# Altium PCB BQ76930.PcbDoc
Units mm, origin at the board's own origin, x right, y up, seen from the top; angles counter-clockwise.
Board outline 83 x 63 mm, 2 copper layers (Top Layer, Bottom Layer); 121 components, 76 nets, 390 pads, 190 vias.
Unrouted connection lines stored in the file: 1.
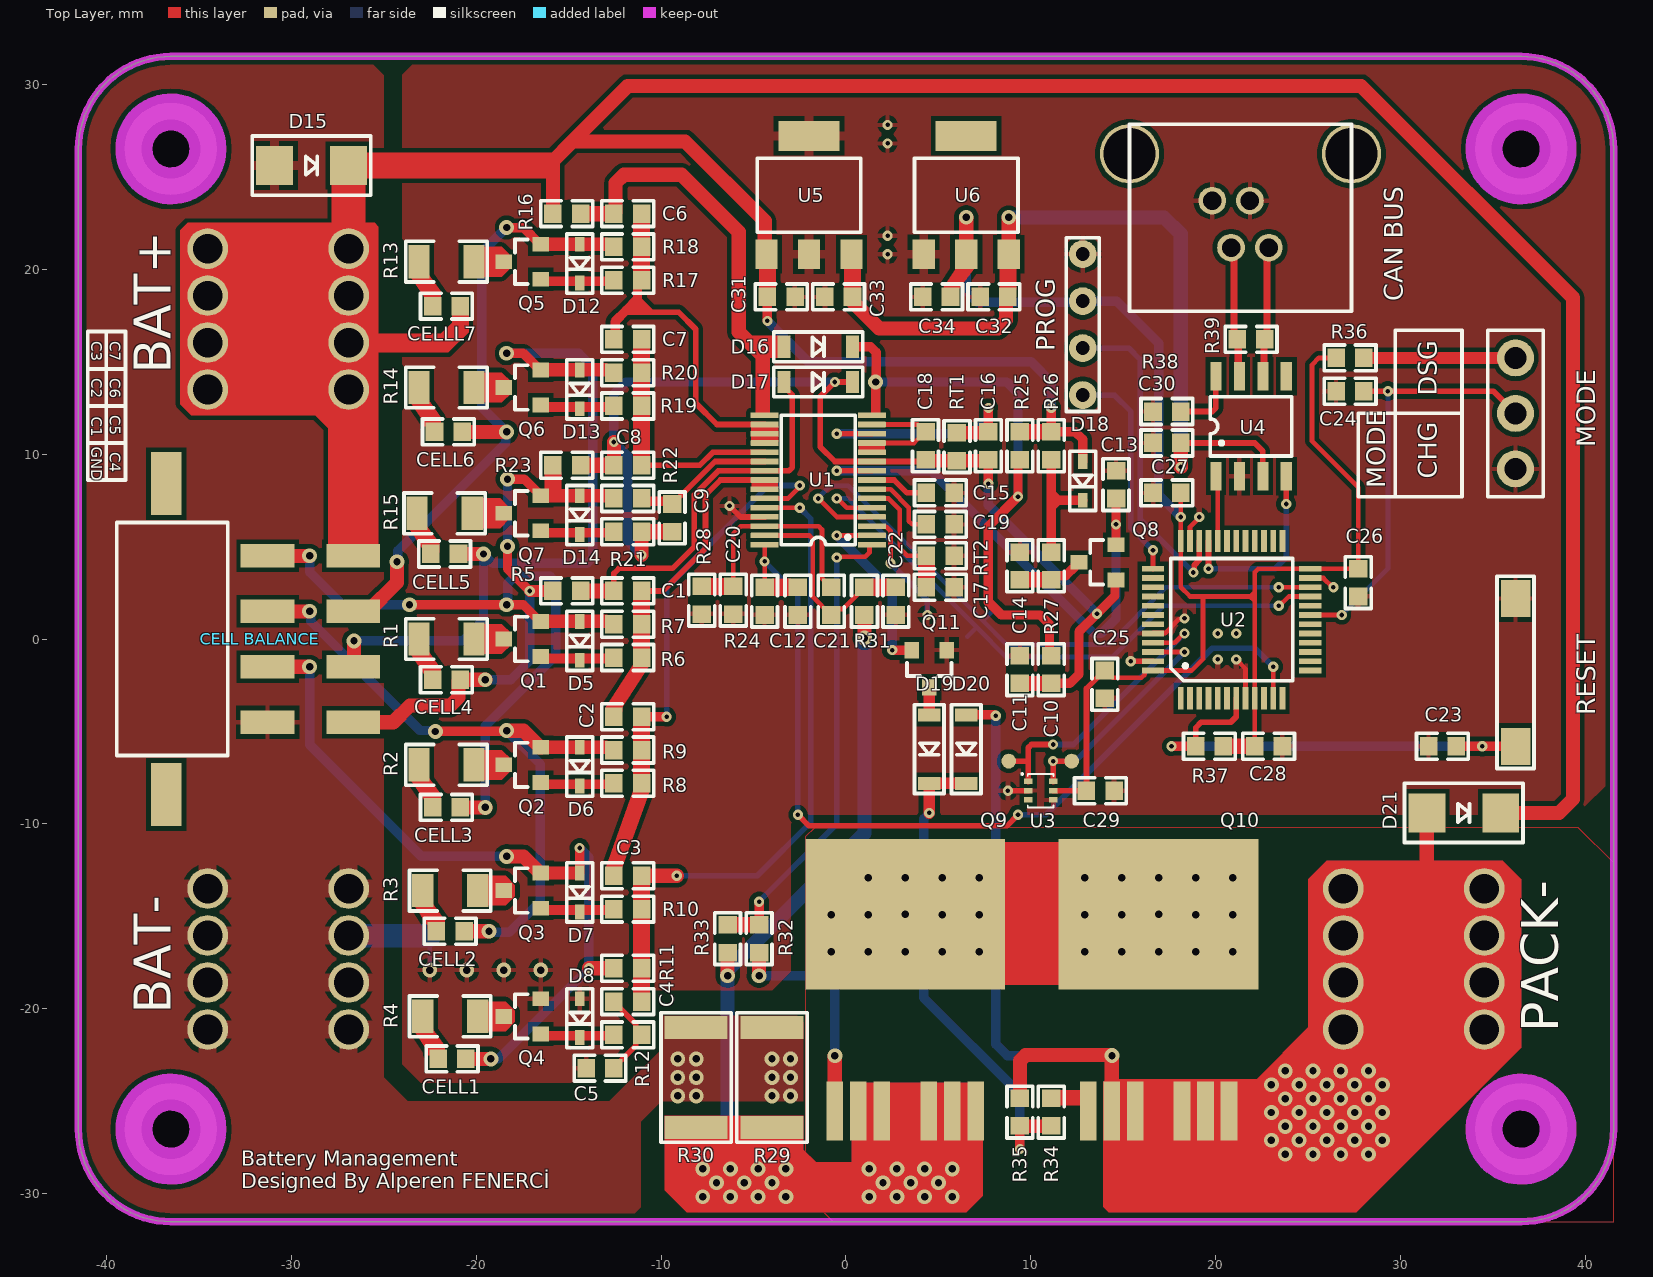
[diagram p0: Top Layer view]
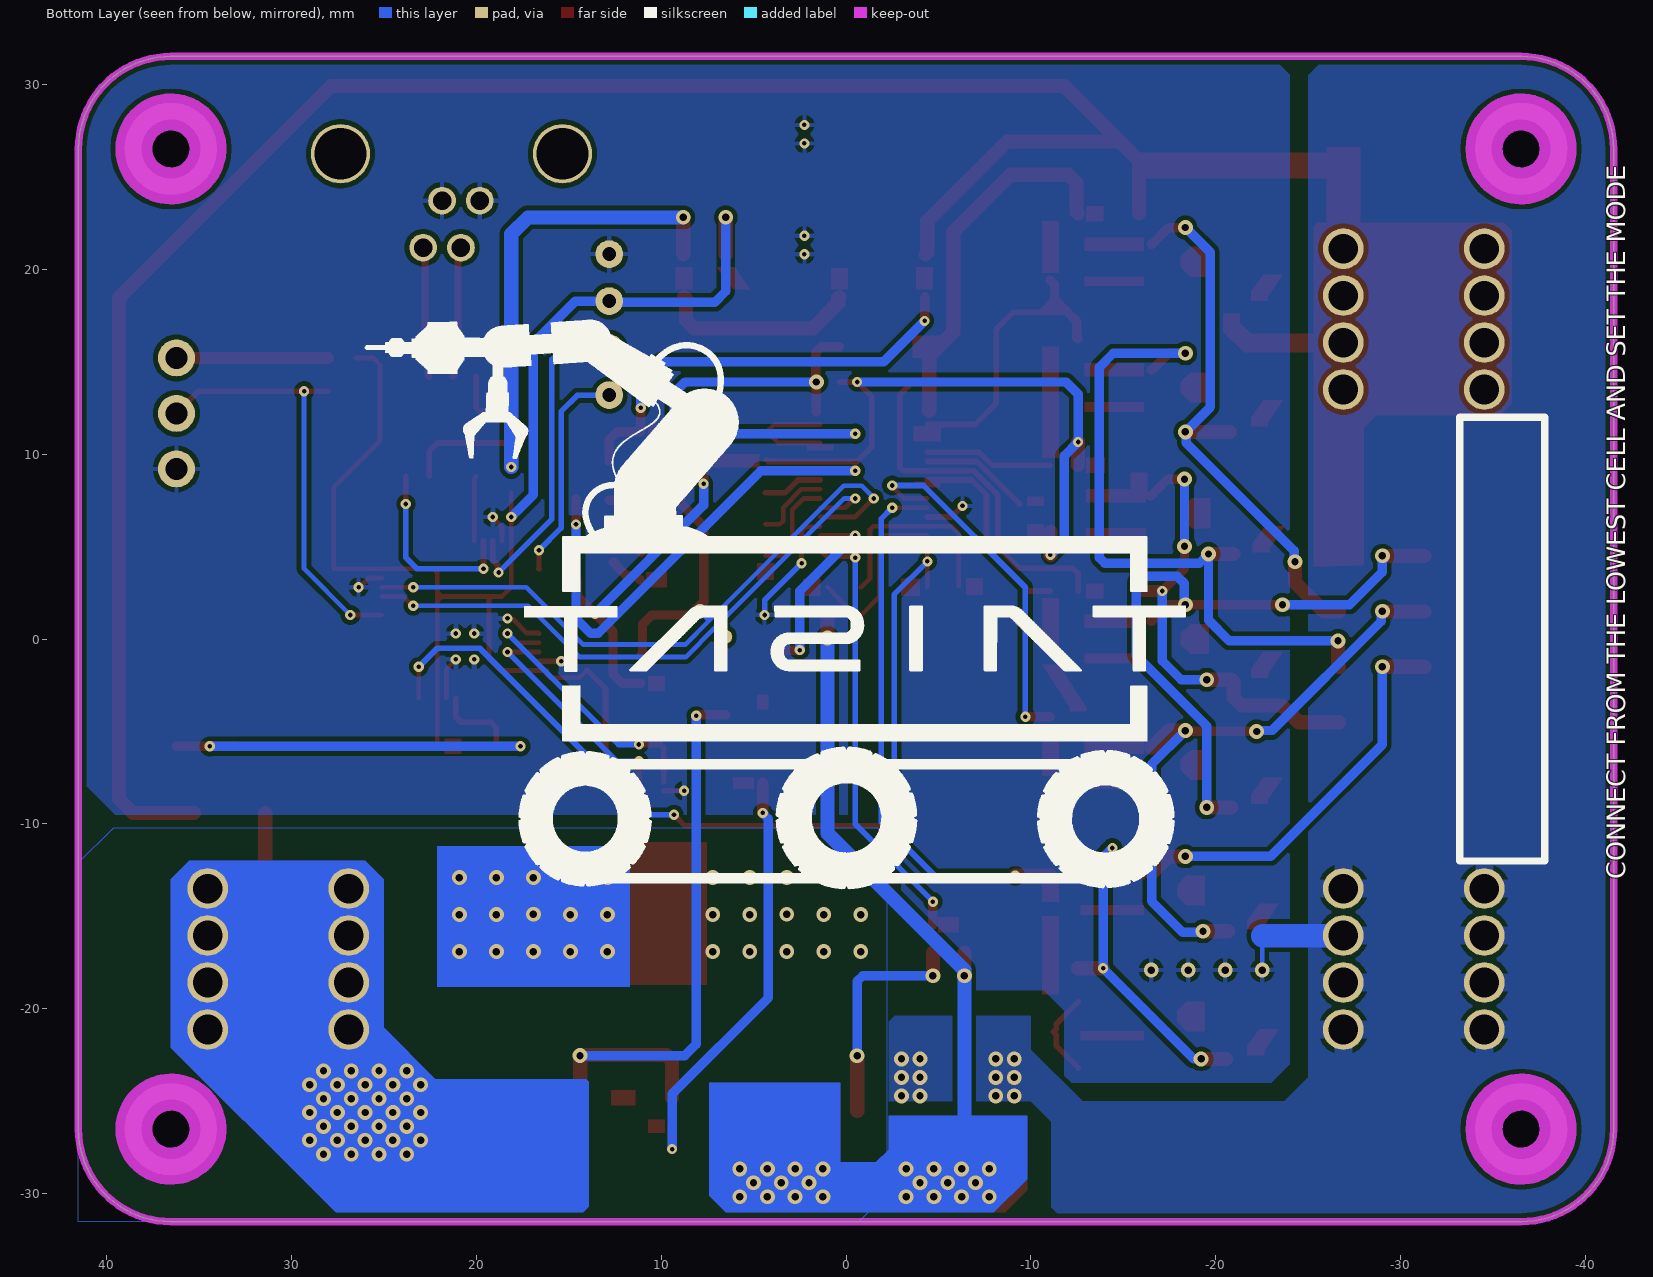
[diagram p1: Bottom Layer view, seen from below]
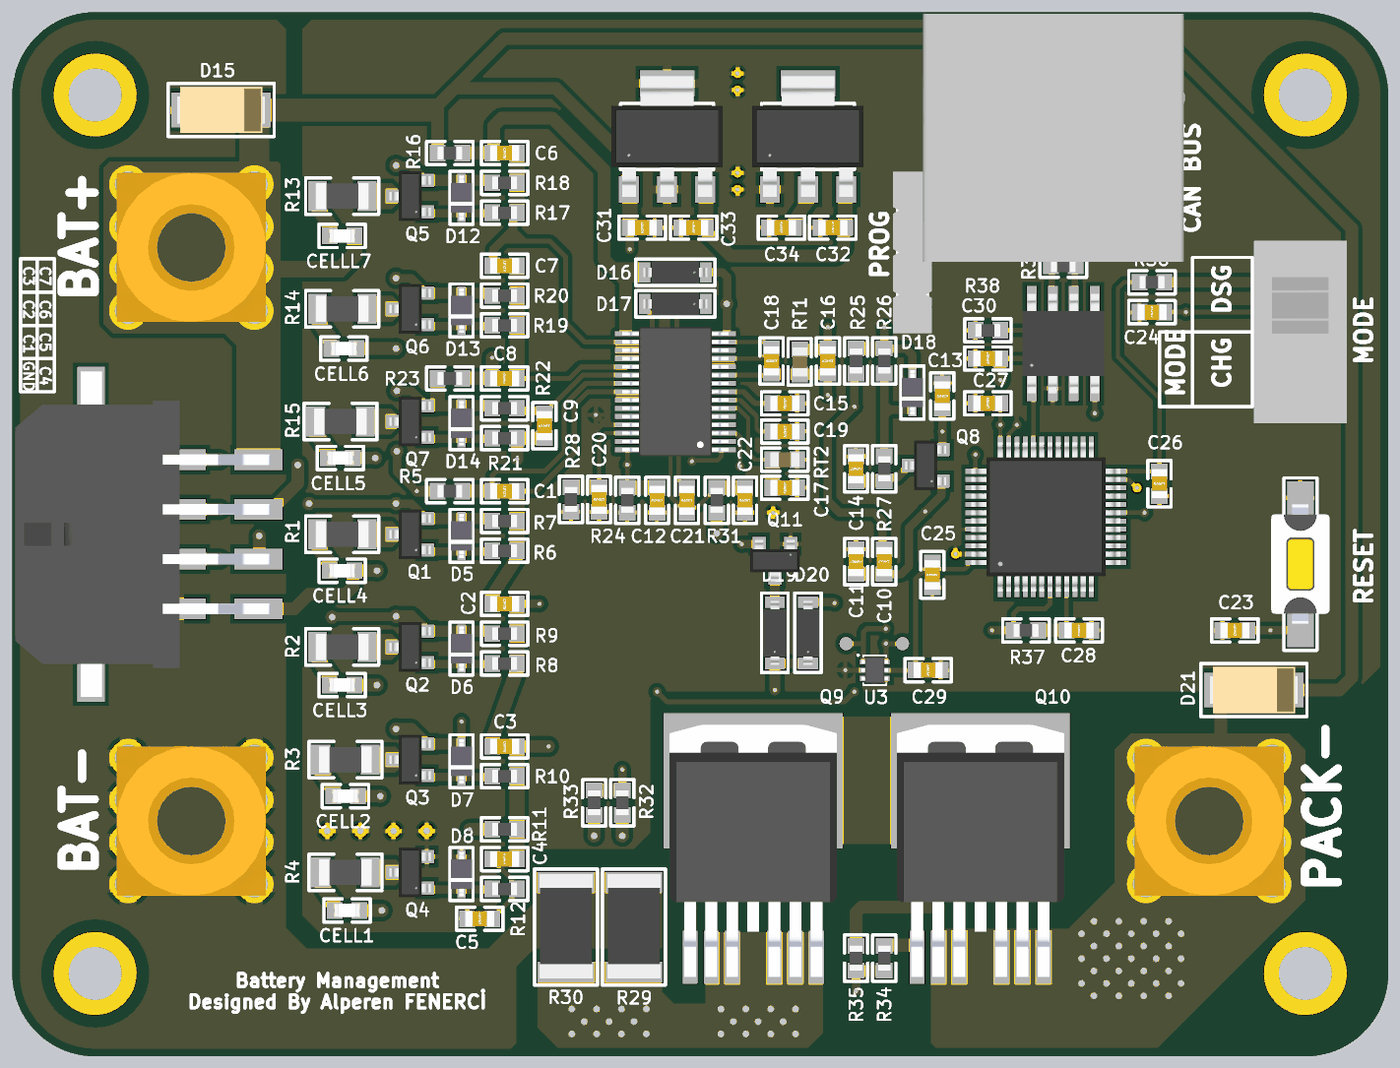
[diagram p2: 3D render of the assembled board from above, using the file's embedded part models]

## Layer stack, top to bottom
Top Solder: solder mask 0.0102, Solder Resist, Dk 3.5
Top Layer: signal copper 0.0356
Dielectric 1: dielectric 0.32, FR-4, Dk 4.8
Bottom Layer: signal copper 0.0356
Bottom Solder: solder mask 0.0102, Solder Resist, Dk 3.5

## Board outline
-41.5,-26.5 -41.5,26.5 cw(c-36.5,26.5) -36.5,31.5 36.5,31.5 cw(c36.5,26.5) 41.5,26.5 41.5,-26.5 cw(c36.5,-26.5) 36.5,-31.5 -36.5,-31.5 cw(c-36.5,-26.5)

## Design rules (kind name [scope] priority, off if disabled: settings)
Clearance [All] p1: gap=0.254 ignorepadtopadclearanceinfootprint=TRUE except(0: Arc-Hole Track-Hole SMDPad-Hole THPad-Hole Via-Hole Fill-Hole Poly-Hole Region-Hole Text-Hole; 0.127: Arc-Arc Arc-Track Arc-SMDPad Track-Track Track-SMDPad SMDPad-SMDPad)
DiffPairsRouting [All] p1: maxlimit=0.254 minlimit=0.254 mostfreqgap=0.254 toplayer_minwidth=0.381 toplayer_maxwidth=0.381 toplayer_prefwidth=0.381 bottomlayer_minwidth=0.381 bottomlayer_maxwidth=0.381 bottomlayer_prefwidth=0.381 maxuncoupledlength=12.7
PlaneConnect [All] p1: planeconnectstyle=Direct reliefexpansion=0.508 reliefentries=4 reliefconductorwidth=0.254 reliefairgap=0.254
PolygonConnect [All] p1: connectstyle=Relief reliefconductorwidth=0.254 reliefentries=4 polygonreliefangle="90 Angle" airgapwidth=0.254
RoutingVias [All] p1: holewidth=0.711 width=1.27 viastyle="Through Hole" minholewidth=0.711 minwidth=1.27 maxholewidth=0.711 maxwidth=1.27
SolderMaskExpansion [All] p1: expansion=0.102 istentingtop=FALSE
Width [All] p1: maxlimit=1.27 minlimit=0.254 preferedwidth=0.305 minimp=50.000000 maximp=50.000000 favimp=50.000000
28 further rules are at their usual default settings.

## Classes and differential pairs
component class TopLevel: J1 J2 J3 J4
component class "Power Management": C31 C32 C33 C34 U5 U6
component class FET: C20 C21 C22 D19 D20 D21 Q9 Q10 Q11 R28 R29 R30 R31 R32 R33 R34 R35
component class BMS: C1 C2 C3 C4 C5 C6 C7 C8 C9 C10 C11 C12 C13 C14 C15 C16 C17 C18 C19 D1 D2 D3 D4 D5 D6 D7 D8 D9 D10 D11 D12 D13 D14 D15 D16 D17 D18 Q1 Q2 Q3 Q4 Q5 Q6 Q7 Q8 R1 R2 R3 R4 R5 R6 R7 R8 R9 R10 R11 R12 R13 R14 R15 R16 R17 R18 R19 R20 R21 R22 R23 R24 R25 R26 R27 RT1 RT2 U1
component class Misc: C29 C30 "CAN BUS" R38 R39 R42 R43 U3 U4
component class MCU: C23 C24 C25 C26 C27 C28 J5 MODE R36 R37 R42 R43 U2
differential pair CAN: +CAN_P -CAN_N

## Components (designator, comment, footprint, x,y, rotation, side; value= is the part's Value field where it differs from the comment)
BAT+ "7460305" 7460305 -30.7,17.3 r90 top (schematic designator J2)
BAT- "7460305" 7460305 -30.7,-17.3 r90 top (schematic designator J4)
C1 "CAP 0603" "CAP 0603" -11.8,2.6 r0 top value=0.22uF
C2 "CAP 0603" "CAP 0603" -11.8,-4.2 r0 top value=0.22uF
C3 "CAP 0603" "CAP 0603" -11.8,-12.8 r0 top value=0.22uF
C4 "CAP 0603" "CAP 0603" -11.8,-19.6 r180 top value=0.22uF
C5 "CAP 0603" "CAP 0603" -13.3,-23.2 r180 top value=0.22uF
C6 "CAP 0603" "CAP 0603" -11.8,23 r0 top value=0.22uF
C7 "CAP 0603" "CAP 0603" -11.8,16.2 r0 top value=0.22uF
C8 "CAP 0603" "CAP 0603" -11.8,9.4 r180 top value=0.22uF
C9 "CAP 0603" "CAP 0603" -9.4,6.55 r270 top value=0.22uF
C10 "CAP 0603" "CAP 0603" 11.1,-1.65 r270 top value=10uF
C11 "CAP 0603" "CAP 0603" 9.4,-1.65 r90 top value=10uF
C12 "CAP 0603" "CAP 0603" -2.6,2.05 r270 top value=470pF
C13 "CAP 0603" "CAP 0603" 14.6,8.35 r90 top value=1uF
C14 "CAP 0603" "CAP 0603" 9.4,3.95 r90 top value=1uF
C15 "CAP 0603" "CAP 0603" 5.1,7.9 r0 top value=4.7uF
C16 "CAP 0603" "CAP 0603" 7.7,10.45 r270 top value=4700pF
C17 "CAP 0603" "CAP 0603" 5.1,2.8 r0 top value=4700pF
C18 "CAP 0603" "CAP 0603" 4.3,10.45 r270 top value=1uF
C19 "CAP 0603" "CAP 0603" 5.1,6.2 r0 top value=1uF
C20 "CAP 0603" "CAP 0603" -6.1,2.1 r270 top value=0.1uF
C21 "CAP 0603" "CAP 0603" -0.8,2.05 r270 top value=0.1uF
C22 "CAP 0603" "CAP 0603" 2.7,2.05 r270 top value=0.1uF
C23 "CAP 0603" "CAP 0603" 32.25,-5.8 r180 top value=0.1uF
C24 "CAP 0603" "CAP 0603" 27.25,13.4 r180 top value=0.1uF
C25 "CAP 0603" "CAP 0603" 14,-2.45 r270 top value=0.1uF
C26 "CAP 0603" "CAP 0603" 27.7,3.05 r270 top value=0.1uF
C27 "CAP 0603" "CAP 0603" 17.35,7.9 r180 top value=0.1uF
C28 "CAP 0603" "CAP 0603" 22.85,-5.8 r0 top value=0.1uF
C29 "CAP 0603" "CAP 0603" 13.75,-8.2 r0 top value=0.1uF
C30 "CAP 0603" "CAP 0603" 17.35,10.6 r180 top value=0.1uF
C31 "CAP 0603" "CAP 0603" -3.5,18.5 r0 top value=0.33uF
C32 "CAP 0603" "CAP 0603" 8,18.5 r180 top value=0.1uF
C33 "CAP 0603" "CAP 0603" -0.4,18.5 r180 top value=100nF
C34 "CAP 0603" "CAP 0603" 4.9,18.5 r180 top value=10uF
"CAN BUS" "DS1133-03-S60BX" RJ6P4C 21.33,22.43 r180 top (schematic designator RJ1)
CELL1 "LTW-C191TLA" "LED 0603" -21.3,-22.7 r0 top (schematic designator D4)
CELL2 "LTW-C191TLA" "LED 0603" -21.4,-15.8 r0 top (schematic designator D3)
CELL3 "LTW-C191TLA" "LED 0603" -21.6,-9.1 r0 top (schematic designator D2)
CELL4 "LTW-C191TLA" "LED 0603" -21.6,-2.2 r0 top (schematic designator D1)
CELL5 "LTW-C191TLA" "LED 0603" -21.7,4.6 r0 top (schematic designator D11)
CELL6 "LTW-C191TLA" "LED 0603" -21.5,11.2 r0 top (schematic designator D10)
"CELL BALANCE" "HEADER-MALE-SMT-90C-4COL-2ROW" 0430450810 -31.7,0 r270 top (schematic designator J1)
CELLL7 "LTW-C191TLA" "LED 0603" -21.6,18 r0 top (schematic designator D9)
D5 "MM3Z5V1T1G" SOD323 -14.4,-0.1 r90 top
D6 "MM3Z5V1T1G" SOD323 -14.4,-6.9 r90 top
D7 "MM3Z5V1T1G" SOD323 -14.4,-13.7 r90 top
D8 "MM3Z5V1T1G" SOD323 -14.4,-20.5 r90 top
D12 "MM3Z5V1T1G" SOD323 -14.4,20.3 r90 top
D13 "MM3Z5V1T1G" SOD323 -14.4,13.5 r90 top
D14 "MM3Z5V1T1G" SOD323 -14.4,6.7 r90 top
D15 "SMAJ36A-HT" DO214AC -28.9,25.6 r180 top
D16 "BAV20W-7-F" SOD123 -1.5,15.8 r180 top
D17 "BAV20W-7-F" SOD123 -1.5,13.9 r180 top
D18 "1N4148WS" SOD323 12.8,8.55 r90 top
D19 "1N4007W" SOD123 4.5,-5.95 r90 top
D20 "MMSZ36V-HT" SOD123 6.5,-5.95 r90 top
D21 "US1D_R1" DO214AC 33.4,-9.4 r180 top
MODE "L-KLS7-SS-12F20A" SPDT 36.2,12.2 r270 top (schematic designator SW2)
PACK- "7460305" 7460305 30.7,-17.3 r90 top (schematic designator J3)
PROG "146285-4" HMATHT00C41 12.8,17 r90 top (schematic designator J5)
Q1 "2N7002K" SOT23-3 -17.5,0 r90 top
Q2 "2N7002K" SOT23-3 -17.5,-6.8 r90 top
Q3 "2N7002K" SOT23-3 -17.5,-13.6 r90 top
Q4 "2N7002K" SOT23-3 -17.5,-20.4 r90 top
Q5 "2N7002K" SOT23-3 -17.5,20.4 r90 top
Q6 "2N7002K" SOT23-3 -17.5,13.6 r90 top
Q7 "2N7002K" SOT23-3 -17.5,6.8 r90 top
Q8 "2N7002K" SOT23-3 13.6,4.15 r90 top
Q9 "IRF2804STRL" D2PAK-7 3.2,-20.2 r0 top
Q10 "IRF2804STRL" D2PAK-7 16.9,-20.2 r0 top
Q11 "PJA3441" SOT23-3 4.5,-1.6 r180 top
R1 "RES 1206" "RESISTOR 1206" -21.6,0 r180 top value=4.7kR
R2 "RES 1206" "RESISTOR 1206" -21.6,-6.8 r180 top value=4.7kR
R3 "RES 1206" "RESISTOR 1206" -21.4,-13.6 r180 top value=4.7kR
R4 "RES 1206" "RESISTOR 1206" -21.4,-20.4 r180 top value=4.7kR
R5 "RES 0603" "RESISTOR 0603" -15.1,2.6 r180 top value=1kR
R6 "RES 0603" "RESISTOR 0603" -11.8,-1 r180 top value=10kR
R7 "RES 0603" "RESISTOR 0603" -11.8,0.8 r180 top value=1kR
R8 "RES 0603" "RESISTOR 0603" -11.8,-7.8 r180 top value=10kR
R9 "RES 0603" "RESISTOR 0603" -11.8,-6 r180 top value=1kR
R10 "RES 0603" "RESISTOR 0603" -11.8,-14.6 r180 top value=10kR
R11 "RES 0603" "RESISTOR 0603" -11.8,-17.8 r180 top value=1kR
R12 "RES 0603" "RESISTOR 0603" -11.8,-21.4 r180 top value=10kR
R13 "RES 1206" "RESISTOR 1206" -21.6,20.4 r180 top value=4.7kR
R14 "RES 1206" "RESISTOR 1206" -21.6,13.6 r180 top value=4.7kR
R15 "RES 1206" "RESISTOR 1206" -21.7,6.8 r180 top value=4.7kR
R16 "RES 0603" "RESISTOR 0603" -15.1,23 r180 top value=1kR
R17 "RES 0603" "RESISTOR 0603" -11.8,19.4 r180 top value=10kR
R18 "RES 0603" "RESISTOR 0603" -11.8,21.2 r180 top value=1kR
R19 "RES 0603" "RESISTOR 0603" -11.8,12.6 r180 top value=10kR
R20 "RES 0603" "RESISTOR 0603" -11.8,14.4 r180 top value=1kR
R21 "RES 0603" "RESISTOR 0603" -11.8,5.8 r180 top value=10kR
R22 "RES 0603" "RESISTOR 0603" -11.8,7.6 r180 top value=1kR
R23 "RES 0603" "RESISTOR 0603" -15.1,9.4 r180 top value=1kR
R24 "RES 0603" "RESISTOR 0603" -4.4,2.05 r90 top value=499kR
R25 "RES 0603" "RESISTOR 0603" 9.4,10.45 r270 top value=1kR
R26 "RES 0603" "RESISTOR 0603" 11.1,10.45 r90 top value=100kR
R27 "RES 0603" "RESISTOR 0603" 11.1,3.95 r90 top value=100R
R28 "RES 0603" "RESISTOR 0603" -7.8,2.1 r90 top value=100R
R29 "RES 2512" "RESISTOR 2512" -4,-23.7 r270 top value=15mR
R30 "RES 2512" "RESISTOR 2512" -8.1,-23.7 r270 top value=15mR
R31 "RES 0603" "RESISTOR 0603" 1,2.05 r90 top value=100R
R32 "RES 0603" "RESISTOR 0603" -6.4,-16.2 r90 top value=1MR
R33 "RES 0603" "RESISTOR 0603" -4.7,-16.2 r90 top value=2.5kR
R34 "RES 0603" "RESISTOR 0603" 11.1,-25.575 r270 top value=5kR
R35 "RES 0603" "RESISTOR 0603" 9.4,-25.575 r270 top value=1MR
R36 "RES 0603" "RESISTOR 0603" 27.25,15.2 r180 top value=1kR
R37 "RES 0603" "RESISTOR 0603" 19.65,-5.8 r0 top value=1kR
R38 "RES 0603" "RESISTOR 0603" 17.35,12.3 r0 top value=100kR
R39 "RES 0603" "RESISTOR 0603" 21.9,16.2 r0 top value=120R
RESET "DTSML-31R" DTSML 36.2,-1.8 r90 top (schematic designator SW1)
RT1 "NTC 0603" "NTC 0603" 6,10.4 r90 top value=10kR
RT2 "NTC 0603" "NTC 0603" 5.1,4.5 r180 top value=10kR
U1 "BQ76930" TSSOP-30 -1.5,8.6 r180 top
U2 "STM32F103x8" LQFP48 20.85,1.05 r0 top
U3 "TMP112AIDRLT" SOT563 10.525,-8.2 r0 top
U4 "MCP2551T-I" SOIC-8 21.9,11.5 r90 top
U5 "LM7805MPX" SOT223-3 -2,24 r0 top
U6 "LD1117AS33" SOT223-3 6.5,24 r0 top

## Footprints (in the part's own frame and the unit in brackets; to place one, negate y for a bottom-side part, rotate by r counter-clockwise, add the part's x,y. Pads: shape width x height; smd on the part's side, far side on the other; paste and mask are expansions set on the pad)
7460305 [mm]
  round 2.2 hole 1.6 mask+0.05: 1(-3.81,-3.81) 1(-3.81,3.81) 1(-1.27,3.81) 1(-1.27,-3.81) 1(1.27,3.81) 1(1.27,-3.81) 1(3.81,-3.81) 1(3.81,3.81)
  body extent -4.5,-4.5 4.5,4.5, height 7
0430450810 [mm]
  rect 1.27x2.9 smd mask+0.05: 1(-4.5,5.055) 2(-1.5,5.055) 3(1.5,5.055) 4(4.5,5.055) 5(-4.5,0.425) 6(-1.5,0.425) 7(1.5,0.425) 8(4.5,0.425)
  rect 3.4x1.65 smd mask+0.05: ""(-8.4,-5.055) ""(8.4,-5.055)
  silkscreen extent -6.3,-7.73 6.3,-1.73, body extent -9.82,-9.62 9.82,5.77, height 8.77
"CAP 0603" [mm]
  rect 0.95x1 smd mask+0.05: 1(-0.75,0) 2(0.75,0)
  silkscreen extent -1.4,-0.7 1.4,0.7, body extent -0.88,-0.47 0.88,0.48, height 0.95
D2PAK-7 [mm] "TO-263-7"
  rect 0.9x3.2 smd mask+0.05: 1(-3.81,-5.325) 2(-2.54,-5.325) 2(-1.27,-5.325) 2(1.27,-5.325) 2(2.54,-5.325) 2(3.81,-5.325)
  rect 10.8x8.15 smd mask+0.05: 3(0,5.325)
  body extent -5.05,-6.54 5.05,8.7, height 4.88
DO214AC [mm] "SMA"
  rect 2x2.1 smd mask+0.05: 1(-2,0) 2(2,0)
  silkscreen extent -3.2,-1.6 3.2,1.6, body extent -2.64,-1.4 2.64,1.4, height 2.34
DTSML [mm] "Switch"
  rect 2x1.6 smd mask+0.05: 1(-4,0) 2(4,0)
  silkscreen extent -5.2,-1 5.2,1, body extent -3.6,-1.76 3.6,1.76, height 4.12
HMATHT00C41 [mm]
  round 1.5 hole 0.75 mask+0.05: 1(-3.81,0) 2(-1.27,0) 3(1.27,0) 4(3.81,0)
  silkscreen extent -4.7,-0.9 4.7,0.9, body extent -4.88,-1.17 4.88,1.17, height 4.58
"LED 0603" [mm]
  rect 0.95x1 smd mask+0.05: 1(-0.75,0) 2(0.75,0)
  silkscreen extent -1.4,-0.7 1.4,0.7, body extent -0.8,-0.4 0.8,0.4, height 0.65
LQFP48 [mm]
  rect 0.3x1.2 smd mask+0.05: 1(-2.75,-4.25) 2(-2.25,-4.25) 3(-1.75,-4.25) 4(-1.25,-4.25) 5(-0.75,-4.25) 6(-0.25,-4.25) 7(0.25,-4.25) 8(0.75,-4.25) 9(1.25,-4.25) 10(1.75,-4.25) 11(2.25,-4.25) 12(2.75,-4.25) 25(2.75,4.25) 26(2.25,4.25) 27(1.75,4.25) 28(1.25,4.25) 29(0.75,4.25) 30(0.25,4.25) 31(-0.25,4.25) 32(-0.75,4.25) 33(-1.25,4.25) 34(-1.75,4.25) 35(-2.25,4.25) 36(-2.75,4.25)
  rect 1.2x0.3 smd mask+0.05: 13(4.25,-2.75) 14(4.25,-2.25) 15(4.25,-1.75) 16(4.25,-1.25) 17(4.25,-0.75) 18(4.25,-0.25) 19(4.25,0.25) 20(4.25,0.75) 21(4.25,1.25) 22(4.25,1.75) 23(4.25,2.25) 24(4.25,2.75) 37(-4.25,2.75) 38(-4.25,2.25) 39(-4.25,1.75) 40(-4.25,1.25) 41(-4.25,0.75) 42(-4.25,0.25) 43(-4.25,-0.25) 44(-4.25,-0.75) 45(-4.25,-1.25) 46(-4.25,-1.75) 47(-4.25,-2.25) 48(-4.25,-2.75)
  silkscreen extent -3.3,-3.3 3.3,3.3, body extent -4.5,-4.5 4.5,4.5, height 1.6
"NTC 0603" [mm]
  rect 0.95x1 smd mask+0.05: 1(-0.75,0) 2(0.75,0)
  silkscreen extent -1.4,-0.7 1.4,0.7, body extent -0.88,-0.44 0.88,0.44, height 0.89
"RESISTOR 0603" [mm]
  rect 0.95x1 smd mask+0.05: 1(-0.75,0) 2(0.75,0)
  silkscreen extent -1.4,-0.7 1.4,0.7, body extent -0.76,-0.38 0.76,0.38, height 0.36
"RESISTOR 1206" [mm]
  rect 1.15x1.8 smd mask+0.05: 1(-1.49,0) 2(1.49,0)
  silkscreen extent -2.2,-1.1 2.2,1.1, body extent -1.6,-0.8 1.6,0.8, height 0.64
"RESISTOR 2512" [mm]
  rect 1.25x3.4 smd mask+0.05: 1(-2.7,0) 2(2.7,0)
  silkscreen extent -3.5,-1.9 3.5,1.9, body extent -3.2,-1.6 3.1,1.6, height 0.71
RJ6P4C [mm]
  round 1.5 hole 1 mask+0.05: 1(-1.53,1.27) 2(-0.51,-1.27) 3(0.51,1.27) 4(1.53,-1.27)
  round 3.2 hole 2.8 mask+0.05: ""(-6,-3.81) ""(6,-3.81)
  silkscreen extent -6,-5.4 6,4.7, body extent -7.91,-8.99 7.91,6, height 14.6
SOD123 [mm]
  rect 0.7x1.2 smd mask+0.05: 1(-1.85,0) 2(1.85,0)
  silkscreen extent -2.4,-0.8 2.4,0.8, body extent -1.92,-0.67 1.92,0.67, height 0.81
SOD323 [mm]
  rect 0.8x0.5 smd mask+0.05: 1(-1.05,0) 2(1.05,0)
  silkscreen extent -1.6,-0.7 1.6,0.7, body extent -1.34,-0.65 1.34,0.65, height 0.94
SOIC-8 [mm]
  rect 1.55x0.6 smd mask+0.05: 1(-2.7,1.905) 2(-2.7,0.635) 3(-2.7,-0.635) 4(-2.7,-1.905) 5(2.7,-1.905) 6(2.7,-0.635) 7(2.7,0.635) 8(2.7,1.905)
  silkscreen extent -1.6,-2.2 1.6,2.2, body extent -3,-2.45 3,2.45, height 1.76
SOT23-3 [mm]
  rect 0.8x0.9 smd mask+0.05: 1(-0.95,-1) 2(0.95,-1) 3(0,1)
  silkscreen extent -1.2,-0.3 1.2,0.4, body extent -1.5,-1.24 1.5,1.24, height 1.17
SOT223-3 [mm]
  rect 1.2x1.6 smd mask+0.05: 1(-2.3,-3.2) 2(0,-3.2) 3(2.3,-3.2)
  rect 3.3x1.6 smd mask+0.05: 2(0,3.2)
  silkscreen extent -2.8,-2 2.8,2, body extent -3.35,-3.64 3.35,3.64, height 1.81
SOT563 [mm]
  rect 0.45x0.3 smd mask+0.05: 1(-0.675,0.5) 2(-0.675,0) 3(-0.675,-0.5) 4(0.675,-0.5) 5(0.675,0) 6(0.675,0.5)
  silkscreen extent -1.05,-0.9 0.7,0.95, body extent -0.8,-0.8 0.8,0.8, height 0.6
SPDT [mm]
  round 2 hole 1.2: 1(-3,0) 2(0,0) 3(3,0)
  silkscreen extent -4.5,-1.5 4.5,1.5, body extent -5.5,-2.79 5.5,2.79, height 9.95
TSSOP-30 [mm]
  rrect5% 1.5x0.3 smd mask+0.05: 1(-2.9,3.5) 2(-2.9,3) 3(-2.9,2.5) 4(-2.9,2) 5(-2.9,1.5) 6(-2.9,1) 7(-2.9,0.5) 8(-2.9,0) 9(-2.9,-0.5) 10(-2.9,-1) 11(-2.9,-1.5) 12(-2.9,-2) 13(-2.9,-2.5) 14(-2.9,-3) 15(-2.9,-3.5) 16(2.9,-3.5) 17(2.9,-3) 18(2.9,-2.5) 19(2.9,-2) 20(2.9,-1.5) 21(2.9,-1) 22(2.9,-0.5) 23(2.9,0) 24(2.9,0.5) 25(2.9,1) 26(2.9,1.5) 27(2.9,2) 28(2.9,2.5) 29(2.9,3) 30(2.9,3.5)
  silkscreen extent -2,-3.5 2,3.5, body extent -3.2,-3.9 3.2,3.9, height 1.2

## Part data
BAT+ BAT- PACK-: "Connector"
C1 C2 C3 C4 C5 C6 C7 C8 C9 C10 C11 C12 C13 C14 C15 C16 C17 C18 C19 C20 C21 C22 C23 C24 C25 C26 C27 C28 C29 C30 C31 C32 C33 C34: "Multilayer Ceramic Capacitor", Capacitor Type=MLCC, Case/Package=0603
"CAN BUS": library part RJ11, "RJ11 Jack", Positions/Contacts=6P/4C, RJ Type=RJ11
CELL1 CELL2 CELL3 CELL4 CELL5 CELL6 CELLL7: library part "LED 0603", "Chip LED", Case/Package=0603
"CELL BALANCE": library part 0430450810, "Connector", Case/Package=SMD, ComponentLink1Description=Digikey, ComponentLink1URL=https://www.digikey.com/en/products/detail/molex/0430450810/2404815?s=N4IgTCBcDaIAwBYDMiCscAcBGOIC6AvkA, ComponentLink2Description=Ozdisan, ComponentLink2URL=https://ozdisan.com/connectors-and-interconnects/rectangular-connectors/pcb-connectors/L-KLS1-XM1-3-00-2X04-RT/512932, ComponentLink3Description=Datasheet, ComponentLink3URL=https://www.molex.com/en-us/products/part-detail/430450810?display=pdf, ComponentLink4Description=Datasheet, ComponentLink4URL=https://cdn.ozdisan.com/ETicaret_Dosya/482201_886496495..pdf, Contact Type=Male, Pin Positions=8, Pin Rows=2
D5 D6 D7 D8 D12 D13 D14: "Diode Zener", Case/Package=SOD323, Voltage=5.1V, ComponentLink1Description=Ozdisan, ComponentLink1URL=https://ozdisan.com/power-semiconductors/diodes-diode-modules-and-rectifiers/zener-diodes/MM3Z5V1T1G/611730, Diode Type=Zener
D15: "Diode TVS", Case/Package=DO214, Voltage=36V, Diode Type=TVS
D16 D17: "Diode Switch", Case/Package=SOD123, Voltage=150V, Diode Type=Switch
D18: "Diode Gen", Case/Package=DO-41-2, Voltage=75V, ComponentLink1Description=Ozdisan, ComponentLink1URL=https://ozdisan.com/power-semiconductors/diodes-diode-modules-and-rectifiers/general-purpose-diodes/1N4148WS-HT/453557, Diode Type=General
D19: "Diode Gen", Case/Package=DO-41-2, Voltage=1000V, Diode Type=General
D20: "Diode Zener", Case/Package=SOD123, Voltage=36V, Diode Type=Zener
D21: "Diode Gen", Case/Package=DO-214AC, Voltage=200V, Diode Type=General
MODE RESET: "Switch"
  RESET: ComponentLink1Description=Datasheet, ComponentLink1URL=https://cdn.ozdisan.com/ETicaret_Dosya/485632_396522.pdf
PROG: library part HMATHT00C41, "Header for PCB"
Q1 Q2 Q3 Q4 Q5 Q6 Q7 Q8: "MOSFET", Case/Package=SOT23, Current=300mA, Voltage=60V, Transistor Type=N-CH
Q9 Q10: "MOSFET", Case/Package=TO263-7, Current=160A, Voltage=40V, Transistor Type=N-CH
Q11: "MOSFET", Case/Package=SOT23, Current=3.1A, Voltage=40V, Transistor Type=P-CH
R1 R2 R3 R4 R13 R14 R15 R29 R30: "SMD Chip Resistor", Case/Package=1206
R5 R6 R7 R8 R9 R10 R11 R12 R16 R17 R18 R19 R20 R21 R22 R23 R24 R25 R26 R27 R28 R31 R32 R33 R34 R35 R36 R37 R38 R39: "SMD Chip Resistor", Case/Package=0603
RT1 RT2: "Thermistor NTC", Case/Package=0603
U1: "Cell Balance, Cell Monitoring", Case/Package=TSSOP, Category=PMIC
U2: "STM32 ARM Cortex M3", Case/Package=LQFP, Category=MCU, Pins=48
U3: "Temp Sensor", Package/Case=SOT563, Category="Temp Sensor"
U4: "CAN Transceiver", Case/Package=SOIC-8, Category="Interface IC"
U5: "Regulator Linear"
U6: "Regulator Linear", Case/Package=SOT223, Category="Linear Regulator", ComponentLink1Description=Ozdisan, ComponentLink2Description=Datasheet

## Free pads (board coordinates)
  round 0.8 smd far side mask+0.05: TP(6.55,0.125) TP(7.9,1.5)
  round 0.8 smd mask+0.05: TP(8.8,-6.6) TP(12.2,-6.6)
  round 5 hole 3.2 mask+0.05: ""(-36.5,-26.5) ""(-36.5,26.5) ""(36.5,-26.5) ""(36.5,26.5)

## Via types
v1: diameter 0.8, hole 0.4, Top Layer to Bottom Layer, 126 vias
v2: diameter 0.55, hole 0.25, Top Layer to Bottom Layer, 64 vias

## Nets (pads, with @x,y where several pads share a name; then routed paths per layer and width w, separated by ;. In a path a pad name is that pad's centre, name@x,y a point inside that pad or via, vN(x,y) a via of type N, cw(c..) or ccw(c..) an arc to the next point about the centre after c; other vN are vias at no path point)
3V3: C25.1 C26.1 C27.1 C28.1 C29.1 C34.1 PROG.3 R36.2 R37.2 U2.9 U2.24 U2.36 U2.48 U3.5 U6.2 | length 83.6
  Top Layer w0.254: C25.1 14.025,-1.7 14.425,-2.1 15.971,-2.1 16.152,-1.919 16.152,-1.702 16.155,-1.7 18.7,-1.7 19.3,-1.1 19.3,2.3 ; C27.1 v2(18.1,6.6) U2.36 18.1,2.8 18.6,2.3 19.3,2.3 ; C28.1 U2.9 22.1,2.3 ; R36.2 25.568,15.2 25.2,14.832 25.2,10.7 27.7,8.2 C26.1 U2.24 22.279,3.8 22.1,3.621 22.1,2.3 ; 19.3,2.3 22.1,2.3
  Top Layer w0.305: U3.5 C29.1 13,-2.675 13.975,-1.7 C25.1
  Top Layer w0.762: U6.2@6.5,20.8 v1(6.5,22.8)
  Bottom Layer w0.508: v1(6.5,22.8) 6.5,18.8 7.1,18.2 12.73,18.2 PROG.3 14.63,18.27 16.9,16 16.9,7.8 v2(18.1,6.6)
5V: C30.1 C32.1 C33.1 U4.3 U5.3 U6.3 | length 42.2
  Top Layer w0.305: C30.1 22.1,10.6 22.535,10.165 U4.3
  Top Layer w0.762: C33.1 0.421,18.429 0.421,18.179 1.8,16.8 8.21,16.8 8.656,17.246 8.656,18.406 C32.1 ; U6.3 v1(8.8,22.8) ; v2(18.1,9.3) C30.1
  Bottom Layer w0.762: v1(8.8,22.8) 17.2,22.8 18.1,21.9 v2(18.1,9.3)
CAN_N: "CAN BUS.1" R39.2 U4.6 | length 7.1
  Top Layer w0.381: U4.6 22.592,14.258 22.592,16.143 R39.2 22.755,16.305 22.755,21.055 22.86,21.16
CAN_P: "CAN BUS.3" R39.1 U4.7 | length 7.1
  Top Layer w0.381: 20.82,21.16 20.985,20.995 20.985,16.365 R39.1 21.208,16.143 21.208,14.257 U4.7
GND: "CAN BUS.2" "CAN BUS.4" "CELL BALANCE.8" BAT-.1 C5.2 C11.2 C12.2 C13.2 C14.2 C15.2 C17.2 C19.2 C20.2 C22.2 C23.2 C24.2 C25.2 C26.2 C27.2 C28.2 C29.2 C30.2 C31.2 C32.2 C33.2 C34.2 D8.2 D15.2 MODE.3 PROG.4 Q4.2 Q11.1 R24.1 R28.1 R29.1 R30.1 R38.1 RESET.2 RT2.1 U1.3 U1.27 U2.8 U2.23 U2.35 U2.44 U2.47 U3.2 U3.4 U4.2 U5.2 U6.1 | length 24.5
  Top Layer w0.254: U1.3 1.423,6.077 2.178,6.077 2.404,5.851 2.404,4.104 v2(2.4,4.1) ; U2.44 16.623,0.323 17.248,0.323 17.987,1.062 18.243,1.062 v2(18.3,1.119) ; U2.35 18.602,5.302 18.602,6.062 19.1,6.56 v2(19.1,6.6) ; v2(21.1,-1.1) 21.6,-1.6 U2.8 ; U2.23 25.102,3.298 25.812,3.298 26.31,2.8 v2(26.35,2.8)
  Top Layer w0.305: v2(-6.3,7.2) -5.7,6.6 U1.27 ; v2(8.75,-8.2) U3.2 ; v2(15.4,-1.2) U2.47
  Bottom Layer w0.254: -22.53,-16.03 -22.5,-16.06 v1(-22.5,-17.9)
  Bottom Layer w0.305: v2(2.4,4.1) 4.4,2.1 v2(4.4,1.3)
  Bottom Layer w1.27: BAT-.1@-26.89,-16.03 -22.53,-16.03
  other v1: -9.1,-24.7 -8.1,-24.7 -4,-24.7 -3,-24.7 -9.1,-23.7 -8.1,-23.7 -4,-23.7 -3,-23.7 -9.1,-22.7 -8.1,-22.7 -4,-22.7 -3,-22.7 -20.5,-17.9 -18.5,-17.9 -16.5,-17.9
  other v2: 20.1,-1.1 20.1,0.3 21.1,0.3 2.25,20.8 2.25,21.8 2.25,26.8 2.25,27.8
NetC1_1: C1.1 D17.2 R5.1 U1.22 | length 19.4
  Top Layer w0.305: C1.1 -12.55,3.55 -12.281,3.819 -9.381,3.819 -8.2,5 -8.2,7.8 -6.9,9.1 U1.22 -3.079,9.1 -2.9,9.279 -2.9,13.2 -3.35,13.65 D17.2
NetC1_2: C1.2 C2.1 R6.1 R7.1 U1.23 U1.24 | length 10.8
  Top Layer w0.305: C1.2 -9.9,2.6 -7.6,4.9 -7.6,7.789 -6.789,8.6 U1.23
NetC2_2: C2.2 C3.1 R8.1 R9.1 U1.25 | length 20
  Top Layer w0.254: U1.25 -3.134,7.6 v2@-2.5,8.234
  Top Layer w0.305: v2@-2.5,8.234 v2(-2.5,8.3)
  Top Layer w0.508: C2.2 v2(-9.7,-4.2)
  Bottom Layer w0.305: v2@-9.69,-4.19 -9.69,2.801 -4.19,8.3 v2(-2.5,8.3)
NetC3_2: C3.2 C4.1 R10.1 R11.1 U1.26 | length 29.5
  Top Layer w0.254: U1.26 v2(-2.5,7.1)
  Top Layer w0.762: C3.2 v2(-9.15,-12.8)
  Bottom Layer w0.305: v2(-9.15,-12.8) -4.8,-12.8 -1.9,-9.9 -1.9,6.5 v2(-2.5,7.1)
NetC4_2: C4.2 C5.1 R12.1 | length 4.7
  Top Layer w0.305: C5.1 -12.55,-23.175 -11.373,-21.998 -11.373,-21.4 -11.211,-21.239 -11.373,-21.077 -11.373,-20.802 -12.55,-19.625 C4.2
NetC6_1: C6.1 D16.2 R16.1 U1.16 | length 20
  Top Layer w0.762: C6.1 -12.456,23.094 -12.456,24.654 -12.01,25.1 -8.9,25.1 -5.8,22 -5.8,16.6 -4.5,15.3 -4.5,12.331
NetC6_2: C6.2 C7.1 R17.1 R18.1 U1.17 U1.18 U1.19 | length 16.2
  Top Layer w0.305: -11.878,17.772 -11.782,17.675 -9.05,17.675 -8.125,16.75 -8.125,12.75 -6.975,11.6 U1.17
  Top Layer w0.508: C7.1@-12.55,16.225 -12.486,16.289 -12.486,17.164 -11.878,17.772 -11.271,18.379 -11.271,19.179 R17.1
NetC7_2: C7.2 C8.1 R19.1 R20.1 U1.20 | length 6.9
  Top Layer w0.305: C8.1 -7.9,9.4 -7.2,10.1 U1.20
NetC8_2: C8.2 C9.2 C10.2 C11.1 C16.2 C18.2 D17.1 Q8.1 R21.1 R23.1 RT1.1 U1.10 | length 53.3
  Top Layer w0.305: D17.1 v2(-0.6,13.9) -1.4,13.1 -1.4,10.4 -0.602,9.602 1.398,9.602 U1.10 4.2,9.6 C18.2
  Top Layer w0.508: v2(7.7,8.4) C16.2 ; C10.2 12.1,-2.4 12.6,-1.9 12.6,0.4 v2(13.572,1.372) 14.544,2.344 14.544,3.144 Q8.1
  Top Layer w0.762: C8.2 v2(-12.55,10.65) ; v2(-11.05,4.55) R21.1
  Bottom Layer w0.508: v2(-11.05,4.55) -11.8,5.3 -11.8,9.9 v2(-12.55,10.65) -12.55,13.25 -11.9,13.9 v2(-0.6,13.9) ; v2(7.7,8.4) 7.7,7.244 v2(13.572,1.372)
NetC9_1: C9.1 R22.1 U1.21 | length 6
  Top Layer w0.305: C9.1 -9.375,7.3 -7.075,9.6 U1.21
NetC10_1: C10.1 D16.1 R25.2 U1.15 | length 32.1
  Top Layer w0.508: D16.1 1.327,15.8 1.625,15.502 1.625,13.925 v1(1.6,13.9) 1.6,12.275 ; R25.2 9.394,9.7 9.3,9.606 v2(9.3,7.7) 7.7,6.1 7.7,2 8.4,1.3 10.5,1.3 11,0.8 11,-0.806 11.094,-0.9 C10.1
  Bottom Layer w0.508: v1(1.6,13.9) 8.7,13.9 9.3,13.3 v2(9.3,7.7)
NetC12_1: C12.1 R24.2 U1.30 U2.11 | length 48.8
  Top Layer w0.254: R24.2 U1.30 ; U2.11 v2(23.1,-1.5)
  Top Layer w0.305: v2(-2.6,-9.5) -2,-10.1 8.7,-10.1 v2(9.3,-9.5)
  Bottom Layer w0.305: v2(-4.4,4.2) -2.6,2.4 v2(-2.6,-9.5) ; v2(9.3,-9.5) 10.8,-9.5 19.8,-0.5 22.1,-0.5 v2(23.1,-1.5)
NetC13_1: C13.1 Q8.2 U1.9 | length 28.6
  Top Layer w0.305: v2(-0.5,9.1) U1.9
  Top Layer w0.508: Q8.2 v2(14.6,6.2) C13.1
  Bottom Layer w0.508: v2(-0.5,9.1) 4.6,9.1 13.39,0.31 13.81,0.31 14.6,1.1 v2(14.6,6.2)
NetC14_1: C14.1 Q8.3 R27.1 | length 1.9
  Top Layer w0.508: R27.1@11.125,3.2 11.346,3.421 11.871,3.421 12.404,3.954 12.404,4.004 12.55,4.15 Q8.3
NetC15_1: C15.1 U1.8 | length 3.2
  Top Layer w0.305: U1.8 2.6,8.6 3.3,7.9 C15.1
NetC16_1: C16.1 RT1.2 U1.13 | length 12.3
  Top Layer w0.305: v2(-0.5,11.1) U1.13
  Top Layer w0.508: C16.1 v2(7.7,12.5)
  Bottom Layer w0.508: v2(-0.5,11.1) 6.9,11.1 7.7,11.9 v2(7.7,12.5)
NetC17_1: C17.1 RT2.2 U1.6 | length 5.5
  Top Layer w0.254: U1.6 1.402,7.598 2.302,7.598 2.9,7 2.9,4.9 3.3,4.5 RT2.2
NetC18_1: C18.1 U1.11 U1.12 U1.14 | length 6.2
  Top Layer w0.254: U1.12 3.675,10.6 4.275,11.2 3.875,11.6 U1.14
NetC19_1: C19.1 U1.7 | length 4.2
  Top Layer w0.254: U1.7 1.402,8.098 2.413,8.098 3.4,7.111 3.4,6.379 3.579,6.2 C19.1
NetC20_1: C20.1 C21.1 R28.2 U1.28 | length 11.2
  Top Layer w0.254: C20.1 -6.1,5.7 -5.7,6.1 U1.28 -4.2,6.1 -1.479,6.1 -1.3,5.921 -1.3,3.275 -0.825,2.8 C21.1
NetC21_2: C21.2 C22.1 R31.2 U1.29 | length 9.7
  Top Layer w0.254: U1.29 -4.398,5.598 -1.979,5.598 -1.8,5.419 -1.8,2.275 -0.825,1.3 C21.2 -0.477,1.623 -0.177,1.623 0.652,2.452 0.652,2.477 0.975,2.8 R31.2
NetC23_1: C23.1 R37.1 RESET.1 U2.7 | length 25.7
  Top Layer w0.305: R37.1 18.9,-4.8 19.2,-4.5 20.8,-4.5 21.1,-4.2 U2.7
  Top Layer w0.508: v2(17.6,-5.8) R37.1 ; C23.1 v2(34.4,-5.8) RESET.1
  Bottom Layer w0.508: v2(17.6,-5.8) v2(34.4,-5.8)
NetC24_1: C24.1 MODE.2 U2.19 | length 23.5
  Top Layer w0.254: U2.19 v2(26.8,1.3)
  Top Layer w0.305: C24.1 v2(29.3,13.4) 35,13.4 MODE.2
  Bottom Layer w0.254: v2(26.8,1.3) 29.3,3.8 v2(29.3,13.4)
NetC31_1: "CELL BALANCE.1" BAT+.1 C31.1 CELLL7.2 D15.1 D18.2 D21.1 R16.2 R25.1 R26.2 U5.1 | length 133.7
  Top Layer w0.508: v2(-4.25,17.2) C31.1 ; v2(11.1,12.5) R26.2 12.4,11.2 12.8,10.8 D18.2
  Top Layer w0.762: R16.2 -15.85,25.85 -14.8,26.9 ; U5.1 -4.392,20.892 -4.392,22.592 -8.7,26.9 -14.8,26.9 ; D21.1@35.25,-9.4 38.554,-9.4 39.3,-8.654 39.3,18.454 27.854,29.9 -11.8,29.9 -14.8,26.9
  Bottom Layer w0.508: v2(-4.25,17.2) -2.05,15 10,15 11.1,13.9 v2(11.1,12.5)
NetD1_1: CELL4.1 R1.2
NetD1_2: "CELL BALANCE.4" CELL4.2 D14.2 Q7.2 R5.2 R22.2 R23.2 | length 25.2
  Top Layer w0.508: v1@-18.307,8.657 v1(-18.3,8.65) -17.4,8.65 -16.507,7.757 Q7.2@-16.457,7.757 ; v1(-18.3,5.008) -18.3,3.8 v2(-17.1,2.6)
  Top Layer w0.635: v2(-17.1,2.6) R5.2
  Top Layer w0.762: -26.645,-4.5 -24.478,-4.5 -23.578,-3.6 -21.39,-3.6 -20.944,-3.154 -20.944,-2.294 CELL4.2 v1(-19.5,-2.2)
  Bottom Layer w0.508: v1(-19.5,-2.2) -18.125,-2.2 -17.1,-1.175 v2(-17.1,2.6) ; v1(-18.3,5.008) v1(-18.3,8.65)
NetD2_1: CELL3.1 R2.2
NetD2_2: "CELL BALANCE.5" CELL3.2 D5.2 Q1.2 R7.2 | length 35.9
  Top Layer w0.508: v1(-23.6,1.85) v1(-18.35,1.85) ; v1@-18.357,1.857 v1(-18.35,1.85) ; Q1.2@-16.507,0.957 -16.557,0.957 -17.45,1.85 v1(-18.35,1.85)
  Top Layer w0.762: -31.275,4.5 v1(-29,4.5) ; CELL3.2 v1(-19.5,-9.1)
  Bottom Layer w0.508: v1(-29,4.5) -28.993,4.493 -28.993,3.621 -27.221,1.85 v1(-23.6,1.85) ; v1(-19.5,-9.1) -19.5,-4.7 -15.7,-0.9 -15.7,3.102 -15.998,3.4 -17.9,3.4 -18.294,3.006 -18.294,1.906 v1(-18.35,1.85)
NetD3_1: CELL2.1 R3.2
NetD3_2: "CELL BALANCE.6" CELL2.2 D6.2 Q2.2 R9.2 | length 33
  Top Layer w0.508: v1(-22.2,-5) -22.175,-4.975 -18.375,-4.975 v1(-18.35,-4.95)
  Top Layer w0.762: -31.275,1.5 v1(-29,1.5) ; CELL2.2 v1(-19.3,-15.8) ; v1(-18.35,-4.95) -18.343,-4.957 -17.443,-4.957 -16.55,-5.85 Q2.2
  Bottom Layer w0.508: v1(-29,1.5) -28.944,1.444 -28.944,0.96 -23.04,-4.944 -22.256,-4.944 v1(-22.2,-5) ; v1(-19.3,-15.8) -19.25,-15.85 -18.2,-15.85 -16.525,-14.175 -16.525,-6.775 v1(-18.35,-4.95)
NetD4_1: CELL1.1 R4.2
NetD4_2: "CELL BALANCE.7" CELL1.2 D7.2 Q3.2 R11.2 | length 39.9
  Top Layer w0.508: D7.2 v2(-14.4,-11.3)
  Top Layer w0.762: -31.275,-1.5 v1(-29,-1.5) ; CELL1.2 v1(-19.2,-22.7) ; v1(-18.35,-11.75) -18.343,-11.757 -17.443,-11.757 -16.55,-12.65 Q3.2 ; v2(-13.9,-17.8) R11.2
  Bottom Layer w0.508: v1(-29,-1.5) -29,-5.7 -22.95,-11.75 v1(-18.35,-11.75) ; v1(-19.2,-22.7) -18.8,-22.7 v2(-13.9,-17.8) ; v2(-14.4,-11.3) -13.9,-11.8 v2@-13.9,-17.789
NetD5_1: D5.1 Q1.1 R6.2
NetD6_1: D6.1 Q2.1 R8.2
NetD7_1: D7.1 Q3.1 R10.2
NetD8_1: D8.1 Q4.1 R12.2
NetD9_1: CELLL7.1 R13.2
NetD10_1: CELL6.1 R14.2
NetD10_2: "CELL BALANCE.2" CELL6.2 D12.2 Q5.2 R18.2 | length 30.4
  Top Layer w0.508: v1(-18.35,22.25) -18.343,22.243 -17.443,22.243 -16.55,21.35 Q5.2
  Top Layer w0.762: -26.645,1.5 -25.83,1.5 -24.282,3.048 -24.282,4.168 v1(-24.275,4.175) ; CELL6.2 v1(-18.35,11.2)
  Bottom Layer w0.508: v1(-24.275,4.175) -24.236,4.214 -24.236,4.764 -18.389,10.611 -18.389,11.161 v1(-18.35,11.2) -19.7,12.55 -19.7,20.9 v1(-18.35,22.25)
NetD11_1: CELL5.1 R15.2
NetD11_2: "CELL BALANCE.3" CELL5.2 D13.2 Q6.2 R20.2 | length 37.5
  Top Layer w0.508: v1(-18.35,15.45) -18.343,15.443 -17.443,15.443 -16.55,14.55 Q6.2
  Top Layer w0.762: -26.645,-1.5 -26.6,-1.455 v1(-26.6,-0.1) ; CELL5.2 v1(-19.6,4.6)
  Bottom Layer w0.508: v1(-26.6,-0.1) -20.725,-0.1 -19.6,1.025 v1(-19.6,4.6) -19.1,4.1 -13.998,4.1 -13.7,4.398 -13.7,14.7 -14.45,15.45 v1(-18.35,15.45)
NetD12_1: D12.1 Q5.1 R17.2
NetD13_1: D13.1 Q6.1 R19.2
NetD14_1: D14.1 Q7.1 R21.2
NetD18_1: D18.1 R26.1 R27.2 | length 6.7
  Top Layer w0.508: R27.2 11.1,7.4 ; R26.1 11.1,7.4 ; D18.1 11.2,7.5 11.1,7.4
NetD19_1: D19.1 D20.1 R34.2 R35.2 | length 23.3
  Top Layer w0.508: v2(9.4,-27.575) R35.2
  Top Layer w0.635: v2(4.5,-9.4) D19.1
  Bottom Layer w0.508: v2(4.5,-9.4) 4.5,-9.411 4.2,-9.711 4.2,-19.4 9.4,-24.6 v2(9.4,-27.575)
NetD19_2: D19.2 Q11.3
NetD20_2: D20.2 D21.2 PACK-.1 Q10.2 R35.1 | length 39.1
  Top Layer w0.508: D20.2 8.039,-4.1 8.089,-4.15 v2(8.1,-4.15)
  Top Layer w0.762: R35.1 9.4,-22.8 9.7,-22.5 14.36,-22.5 v1(14.38,-22.52) 14.37,-22.53 14.37,-25.515 Q10.2@14.36,-25.525 ; 31.3,-12.4 31.4,-12.3 D21.2
  Bottom Layer w0.508: v2(8.1,-4.15) 8.1,-21.9 8.72,-22.52 v1(14.38,-22.52)
  other v1: 23.75,-27.85 25.25,-27.85 26.75,-27.85 28.25,-27.85 23,-27.1 24.5,-27.1 26,-27.1 27.5,-27.1 29,-27.1 23.75,-26.35 25.25,-26.35 26.75,-26.35 28.25,-26.35 23,-25.6 24.5,-25.6 26,-25.6 27.5,-25.6 29,-25.6 23.75,-24.85 25.25,-24.85 26.75,-24.85 28.25,-24.85 23,-24.1 24.5,-24.1 26,-24.1 27.5,-24.1 29,-24.1 23.75,-23.35 25.25,-23.35 26.75,-23.35 28.25,-23.35
NetQ1_3: Q1.3 R1.1
NetQ2_3: Q2.3 R2.1
NetQ3_3: Q3.3 R3.1
NetQ4_3: Q4.3 R4.1
NetQ5_3: Q5.3 R13.1
NetQ6_3: Q6.3 R14.1
NetQ7_3: Q7.3 R15.1
NetQ9_1: Q9.1 R33.1 | length 12.5
  Top Layer w0.762: v1(-4.7,-18.2) R33.1 ; Q9.1 v1@-0.61,-22.54
  Bottom Layer w0.508: v1(-4.7,-18.2) -0.9,-18.2 -0.6,-18.5 v1(-0.6,-22.53)
NetQ9_2: Q9.2 R29.2 R30.2 R31.1 R32.1 | length 34.3
  Top Layer w0.762: v1(-6.4,-18.2) R32.1 ; v1(1,0.05) R31.1
  Bottom Layer w0.762: v1(-6.25,-28.65) -6.25,-28.571 -6.4,-28.421 v1(-6.4,-18.2) -6.393,-18.193 -6.393,-17.893 1,-10.5 v1(1,0.05)
  other v1: -7.75,-30.15 -6.25,-30.15 -4.75,-30.15 -3.25,-30.15 1.25,-30.15 2.75,-30.15 4.25,-30.15 5.75,-30.15 -7,-29.4 -5.5,-29.4 -4,-29.4 2,-29.4 3.5,-29.4 5,-29.4 -7.75,-28.65 -4.75,-28.65 -3.25,-28.65 1.25,-28.65 2.75,-28.65 4.25,-28.65 5.75,-28.65
NetQ9_3: Q9.3 Q10.3
  other v1: -0.8,-16.9 1.2,-16.9 3.2,-16.9 5.2,-16.9 7.2,-16.9 12.9,-16.9 14.9,-16.9 16.9,-16.9 18.9,-16.9 20.9,-16.9 -0.8,-14.9 1.2,-14.9 5.2,-14.9 7.2,-14.9 12.9,-14.9 14.9,-14.9 18.9,-14.9 20.9,-14.9 3.2,-14.875 16.9,-14.875 1.2,-12.9 3.2,-12.9 5.2,-12.9 7.2,-12.9 12.9,-12.9 14.9,-12.9 16.9,-12.9 18.9,-12.9 20.9,-12.9
NetQ10_1: Q10.1 R34.1
NetQ11_2: Q11.2 U1.2 | length 10.4
  Top Layer w0.254: v2(-0.5,5.6) U1.2
  Top Layer w0.508: v2(2.5,-0.6) Q11.2
  Bottom Layer w0.508: v2(-0.5,5.6) 1,4.1 2.5,2.6 v2(2.5,-0.6)
NetR32_2: R32.2 R33.2 U1.1 | length 24
  Top Layer w0.254: v2(-0.5,4.4) -0.453,4.447 1.047,4.447 1.269,4.669 1.269,5.098 1.271,5.1 U1.1
  Top Layer w0.508: R33.2 v2(-4.7,-14.2)
  Bottom Layer w0.305: v2(-4.7,-14.2) -0.5,-10 v2(-0.5,4.4)
NetR36_1: MODE.1 R36.1 | length 8.2
  Top Layer w0.635: R36.1 MODE.1
NetR38_2: R38.2 U4.8 | length 3.7
  Top Layer w0.305: R38.2 19.8,12.3 19.995,12.495 U4.8
NetU1_4: pad.TP@7.9,1.5 U1.4 U2.22 | length 35.8
  Top Layer w0.254: v2(-1.5,7.6) -0.5,6.6 U1.4 ; v2(23.4,2.8) U2.22
  Bottom Layer w0.254: v2(-1.5,7.6) -1.5,7.635 -0.854,8.281 0.119,8.281 7.38,1.02 ; pad.TP@7.9,1.5 7.42,1.02 7.38,1.02 ; v2(23.4,2.8) 17.3,2.8 14.2,-0.3 8.7,-0.3 7.38,1.02
NetU1_5: pad.TP@6.55,0.125 U1.5 U2.21 | length 33.3
  Top Layer w0.254: v2(-0.5,7.6) -0.465,7.6 0.035,7.1 U1.5 ; v2(23.4,1.8) 23.435,1.8 23.935,2.3 U2.21 U2.21@25.102,2.298
  Bottom Layer w0.254: v2(-0.5,7.6) 0.1,7.6 7.063,0.637 8.675,-0.975 14.4,-0.975 17.175,1.8 v2(23.4,1.8) ; pad.TP@6.55,0.125 7.03,0.605
NetU2_32: U2.32 U4.1 | length 3.5
  Top Layer w0.254: U4.1 20.098,8.697 20.098,5.302 U2.32
NetU2_33: U2.33 U4.4 | length 10.4
  Top Layer w0.305: v2(19.6,3.8) U2.33 ; v2(23.8,7.3) 23.803,7.302 23.803,8.798 U4.4
  Bottom Layer w0.305: v2(19.6,3.8) 23.2,3.8 23.8,4.4 v2(23.8,7.3)
NetU2_45: pad.TP@8.8,-6.6 U2.45 U3.1 | length 15.7
  Top Layer w0.254: U2.45@16.598,-0.198 U2.45 17.765,-0.2 18.265,0.3 v2(18.3,0.3)
  Top Layer w0.305: pad.TP@8.8,-6.6 9.8,-6.6 ; U3.1 9.85,-5.879 10.029,-5.7 v2(11.2,-5.7)
  Bottom Layer w0.305: v2(11.2,-5.7) 12.3,-5.7 v2(18.3,0.3)
NetU2_46: pad.TP@12.2,-6.6 U2.46 U3.6 | length 13.3
  Top Layer w0.254: U2.46 v2(18.3,-0.7)
  Top Layer w0.305: U3.6 v2(11.2,-6.6) pad.TP@12.2,-6.6
  Bottom Layer w0.305: v2(11.2,-6.6) 12.4,-6.6 v2(18.3,-0.7)
SWCLK: PROG.1 U2.37 | length 11.3
  Top Layer w0.254: U2.37 v2(16.6,4.8)
  Bottom Layer w0.305: PROG.1@13.5,13.19 13.519,13.171 14.529,13.171 15.4,12.3 15.4,6 v2(16.6,4.8)
SWDIO: PROG.2 U2.34 | length 17.2
  Top Layer w0.305: v2(18.781,3.6) 18.828,3.647 18.828,3.992 19.1,4.264 U2.34
  Bottom Layer w0.305: PROG.2@13.471,15.759 13.5,15.73 15.286,15.73 15.9,15.116 15.9,6.481 v2(18.781,3.6)
pads on no net: "CAN BUS." "CELL BALANCE." U2.1 U2.2 U2.3 U2.4 U2.5 U2.6 U2.10 U2.12 U2.13 U2.14 U2.15 U2.16 U2.17 U2.18 U2.20 U2.25 U2.26 U2.27 U2.28 U2.29 U2.30 U2.31 U2.38 U2.39 U2.40 U2.41 U2.42 U2.43 U3.3 U4.5

## Polygon pours and split planes (outlines as drawn)
GND on Bottom Layer "GND_L02_P028" (solid, remove dead copper, pour order 28): -10,-22.2 -10,-20.375 -2.625,-20.375 -2.3,-20.7 -2.3,-25 -9,-25 -10,-25 -11.1,-26.1 -11.1,-31.5 -42,-31.5 -42,31.5 -41.5,31.5 -26.01,31.5 -25,30.49 -25,-23.7 -23.7,-25 -12.8,-25
GND on Bottom Layer "GND_L02_P023" (solid, remove dead copper, pour order 23): -22.056,31.5 -23,31.5 -24,30.5 -24,-23 -23,-24 -12.2,-24 -11.8,-23.6 -11.8,-20.1 -10.7,-19 -4,-19 -3,-18 -3,-10 -2.5,-9.5 39.5,-9.5 41.5,-7.5 41.5,31.5
GND on Bottom Layer "NetD20_2" (solid, remove dead copper, pour order 22): 41.5,-31.5 41.5,-12.1 39.6,-10.2 -1.7,-10.2 -2.2,-10.7 -2.2,-30 -0.7,-31.5
GND on Top Layer "GND_L01_P029" (solid, remove dead copper, pour order 29): -10,-22.2 -10,-20.375 -2.625,-20.375 -2.3,-20.7 -2.3,-25 -9,-25 -10,-25 -11.1,-26.1 -11.1,-31.5 -42,-31.5 -42,31.5 -41.5,31.5 -26.01,31.5 -25,30.49 -25,-23.7 -23.7,-25 -12.8,-25
GND on Top Layer "GND_L01_P026" (solid, pour order 26): -22.056,31.5 -23,31.5 -24,30.5 -24,-23 -23,-24 -12.2,-24 -11.8,-23.6 -11.8,-20.1 -10.7,-19 -4,-19 -3,-18 -3,-10 -2.5,-9.5 39.5,-9.5 41.5,-7.5 41.5,31.5
GND on Top Layer "GND_L01_P025" (solid, remove dead copper, pour order 25): 41.5,-31.5 41.5,-12.1 39.6,-10.2 -1.7,-10.2 -2.2,-10.7 -2.2,-30 -0.7,-31.5

## Keep-outs
Keep-Out Layer:
  circle w2: c36.5,26.5 r2
  circle w2: c-36.5,26.5 r2
  circle w2: c36.5,-26.5 r2
  circle w2: c-36.5,-26.5 r2
  lines w0.4: -36.5,31.5 ccw(c-36.5,26.5) -41.5,26.5 -41.5,-26.5 ccw(c-36.5,-26.5) -36.5,-31.5 36.5,-31.5 ccw(c36.5,-26.5) 41.5,-26.5 41.5,26.5 ccw(c36.5,26.5) 36.5,31.5 -36.5,31.5 ; -36.5,31.5 -36.5,31.5

## Other copper
Top Layer:
  region net NetD20_2: 35.8,-22.8 36.5,-22.1 36.5,-13 35.5,-12 26,-12 25,-13 25,-21 22.2,-23.8 14.035,-23.8 13.9,-23.935 13.9,-30.7 14.2,-31 27.6,-31 29.3,-29.3
  pour cut-out: -10.2,-31.1 -10.2,-29.8 -11.472,-31.1
  region net NetC1_2: -13,-3.7 -12.1,-3.7 -12.1,-3.9 -13,-3.9
  region net NetC1_2: -13,-3.7 -11.512,-1.4 -10.6,-1.4 -12.1,-3.7
  region net NetC31_1: -3.8,18.9 -3.8,20.1 -4.7,20.1 -4.7,18.9
  region net NetC31_1: 9.8,11.6 10.7,11.6 10.7,10.8 9.8,10.8
  region net NetC31_1: -26.1,24.9 -15.9,24.9 -15.9,26.255 -15.855,26.3 -26.1,26.3
  region net NetC31_1: -27.8,26.6 -27.8,22.2 -26,22.2 -26,24.6 -26,26.6
  region net NetC31_1: -28.7,12.1 -28,11.4 -28,4 -25.3,3.904 -25.3,22.289 -25.49,22.5 -35.6,22.5 -36,22.1 -36,12.7 -35.4,12.1
  region net NetC31_1: -21.3,17.6 -21.3,17.1 -21.9,16.5 -25.4,16.5 -25.4,15.6 -25.3,15.5 -21.5,15.5 -20.4,16.6 -20.4,17.6
  region net NetR32_2: -5,-15.05 -6.1,-15.05 -6.1,-15.85 -5,-15.85
  region net NetQ9_2: -2.3,-25.775 -9.8,-25.775 -9.8,-29.8 -8.6,-31 6.5,-31 7.4,-30.1 7.4,-24 0.3,-24 0.3,-28.3 -1.6,-28.3 -2.3,-27.6
  region net NetQ9_3: 7.525,-11 11.8,-11 11.8,-18.7 7.525,-18.7
  region net NetD19_1: 9.8,-26 10.7,-26 10.7,-26.7 9.8,-26.7
  region net NetQ10_1: 11.4,-25.2 12.7,-25.2 12.7,-24.4 11.4,-24.4
  region net 3V3: 22.1,2.7 21.7,2.3 22.1,1.9
  region net NetC8_2: 9.8,-2 10.7,-2 10.7,-2.8 9.8,-2.8
  region net NetD18_1: 11.1,8.2 11.8,7.5 11.1,6.8
  region net NetC14_1: 9.7,3.6 10.8,3.6 10.8,2.8 9.7,2.8
  region net NetC16_1: 6.4,11.5 7.3,11.5 7.3,10.8 6.4,10.8
  region net NetC18_1: 0.7,10.2 0.7,10.5 2.1,10.5 2.1,10.2
  region net 3V3: 20.8,-5.4 21.7,-5.4 21.7,-6.2 20.8,-6.2
  region net NetC1_2: -5.1,8.5 -5.1,8.2 -3.7,8.2 -3.7,8.5
  region net NetC6_2: -11.025,18.375 -10.325,17.675 -11.782,17.675
  region net NetC6_2: -5.125,10.7 -3.675,10.7 -3.675,11.5 -5.125,11.5
  region net NetC6_1: -3.6,15.2 -4.4,15.2 -5.6,16.4 -3.6,16.4
  region net NetC17_1: 3.9,3.2 3.9,4.1 4.8,4.1 4.8,3.2
  region net NetC21_2: 1.4,3.25 2.3,3.25 2.3,2.35 1.4,2.35
  region net NetC12_1: -4,3.25 -3,3.25 -3,2.35 -4,2.35
  region net NetC20_1: -7.4,3.3 -6.5,3.3 -6.5,2.4 -7.4,2.4
  region net NetD19_1: 5,-7.5 6.1,-7.5 6.1,-8.1 5,-8.1
  region net NetD19_2: 4.2,-3 4.2,-3.8 4.8,-3.8 4.8,-3
  region net NetC8_2: 4.7,10 7.3,10 7.3,9.3 4.7,9.3
  region net 5V: -0.1,20.05 -0.1,18.9 0.8,18.9 0.8,20.05
  region net 3V3: 6,20.1 5.8,19.8 5.2,18.9 6.1,18.9 6.3,19.2 7,20.1
  region net 5V: 8.3,20.1 8.3,18.9 9.2,18.9 9.2,20.1
  region net NetC2_2: -13,-12.4 -11.5,-8.2 -10.6,-8.2 -12.137,-12.4
  region net NetC8_2: -10.7,5.4 -9.8,5.4 -9.8,6.2 -10.7,6.2
  region net NetC9_1: -10.7,7.2 -9.8,7.2 -9.8,7.7 -10.7,7.7
  region net NetD1_2: -16.3,9 -16.3,7.9 -15.4,7.9 -15.4,9
  region net NetD4_2: -16.15,-12.3 -14.6,-12.3 -14.6,-13 -16.15,-13
  region net NetQ4_3: -19.4,-19.6 -18.4,-19.6 -17.9,-20.1 -17.9,-20.7 -18.4,-21.2 -19.4,-21.2
  region net NetD4_1: -23.4,-21.1 -22.6,-22.3 -22.6,-22.5 -21.7,-22.5 -21.7,-22 -22.355,-21.1
  region net NetC3_2: -11.5,-15 -11.5,-19.2 -10.6,-19.2 -10.6,-15
  region net NetD8_1: -16.1,-21.2 -14.4,-21.2 -12.9,-21.2 -12.7,-21.2 -12.7,-21.7 -16.1,-21.7
  region net NetQ3_3: -19.4,-12.8 -18.4,-12.8 -17.9,-13.3 -17.9,-13.9 -18.4,-14.4 -19.4,-14.4
  region net NetD3_1: -23.4,-14.3 -22.6,-15.5 -22.6,-15.7 -21.7,-15.7 -21.7,-15.2 -22.355,-14.3
  region net NetC3_2: -11.5,-13.2 -11.5,-14.2 -10.6,-14.2 -10.6,-13.2
  region net NetD7_1: -16.1,-14.4 -14.4,-14.4 -12.9,-14.4 -12.7,-14.4 -12.7,-14.9 -16.1,-14.9
  region net NetQ2_3: -19.6,-6 -18.6,-6 -18.1,-6.5 -18.1,-7.1 -18.6,-7.6 -19.6,-7.6
  region net NetD2_1: -23.6,-7.5 -22.8,-8.7 -22.8,-8.9 -21.9,-8.9 -21.9,-8.4 -22.555,-7.5
  region net NetD3_2: -16.1,-5.5 -12.9,-5.5 -12.9,-6.2 -16.1,-6.2
  region net NetC2_2: -11.5,-4.6 -11.5,-7.4 -10.6,-7.4 -10.6,-4.6
  region net NetD6_1: -16.1,-7.6 -14.6,-7.6 -13.1,-7.6 -12.9,-7.6 -12.9,-8.1 -16.1,-8.1
  region net NetQ1_3: -19.6,0.8 -18.6,0.8 -18.1,0.3 -18.1,-0.3 -18.6,-0.8 -19.6,-0.8
  region net NetD1_1: -23.6,-0.7 -22.8,-1.9 -22.8,-2.1 -21.9,-2.1 -21.9,-1.6 -22.555,-0.7
  region net NetD2_2: -16.1,1.3 -12.9,1.3 -12.9,0.6 -16.1,0.6
  region net NetC1_1: -13.9,3 -13,3 -13,2.2 -13.9,2.2
  region net NetC1_2: -11.5,2.2 -11.5,-0.6 -10.6,-0.6 -10.6,2.2
  region net NetD5_1: -16.1,-0.8 -14.6,-0.8 -13.1,-0.8 -12.9,-0.8 -12.9,-1.3 -16.1,-1.3
  region net NetQ7_3: -19.7,7.6 -18.7,7.6 -18.2,7.1 -18.2,6.5 -18.7,6 -19.7,6
  region net NetD11_1: -23.7,6.1 -22.9,4.9 -22.9,4.7 -22,4.7 -22,5.2 -22.655,6.1
  region net NetD1_2: -16.2,8.1 -13,8.1 -13,7.4 -16.2,7.4
  region net NetC8_2: -14,9.8 -13,9.8 -13,9 -14,9
  region net NetD14_1: -16.2,6 -14.7,6 -13.2,6 -13,6 -13,5.5 -16.2,5.5
  region net NetQ6_3: -19.6,14.4 -18.6,14.4 -18.1,13.9 -18.1,13.3 -18.6,12.8 -19.6,12.8
  region net NetD10_1: -23.6,12.9 -22.8,11.7 -22.8,11.5 -21.9,11.5 -21.9,12 -22.555,12.9
  region net NetD11_2: -16.1,14.9 -12.9,14.9 -12.9,14.2 -16.1,14.2
  region net NetC7_2: -11.5,15.8 -11.5,9.8 -10.6,9.8 -10.6,15.8
  region net NetD13_1: -16.1,12.8 -14.6,12.8 -13.1,12.8 -12.9,12.8 -12.9,12.3 -16.1,12.3
  region net NetD12_1: -16.1,19.6 -14.6,19.6 -13.1,19.6 -12.9,19.6 -12.9,19.1 -16.1,19.1
  region net NetC6_2: -11.5,22.6 -11.5,19.8 -10.6,19.8 -10.6,22.6
  region net NetC6_1: -13.9,23.4 -13,23.4 -13,22.6 -13.9,22.6
  region net NetD10_2: -16.1,21.7 -12.9,21.7 -12.9,21 -16.1,21
  region net NetD9_1: -23.6,19.7 -22.8,18.5 -22.8,18.3 -21.9,18.3 -21.9,18.8 -22.555,19.7
  region net NetQ5_3: -19.6,21.2 -18.6,21.2 -18.1,20.7 -18.1,20.1 -18.6,19.6 -19.6,19.6
Bottom Layer:
  pour cut-out: -10.2,-31.1 -10.2,-29.8 -11.472,-31.1
  region net NetQ9_2: -2.3,-25.775 -9.8,-25.775 -9.8,-29.2 -8,-31 6.5,-31 7.4,-30.1 7.4,-24 0.3,-24 0.3,-28.3 -1.6,-28.3 -2.3,-27.6
  region net NetD20_2: 35.8,-22.8 36.5,-22.1 36.5,-13 35.5,-12 26,-12 25,-13 25,-21 22.2,-23.8 14.035,-23.8 13.9,-23.935 13.9,-30.7 14.2,-31 27.6,-31 29.3,-29.3
  region net NetQ9_3: 17.718,-16.869 17.679,-16.908 17.673,-16.911 17.666,-16.918 17.65,-16.924 17.637,-16.927 17.63,-16.934 17.617,-16.937 17.594,-16.94 17.554,-16.942 17.549,-16.94 17.539,-16.944 17.323,-16.942 17.308,-16.944 17.297,-16.936 17.3,-16.252 17.314,-16.247 17.337,-16.25 17.567,-16.249 17.606,-16.252 17.625,-16.255 17.646,-16.267 17.66,-16.27 17.677,-16.285 17.689,-16.293 17.72,-16.324 17.723,-16.33 17.729,-16.337 17.733,-16.343 17.752,-16.385 17.762,-16.418 17.765,-16.431 17.769,-16.464 17.765,-16.766 17.762,-16.776 17.752,-16.809 17.726,-16.857 17.72,-16.864 17.72,-16.867
  region net NetQ9_3: 334 vertices and 0 holes, not listed, extent 15.874,-14.222 19.933,-11.83
  region net NetQ9_3: 266 vertices and 0 holes, not listed, extent 14.019,-13.75 15.614,-12.152
  region net NetQ9_3: 251 vertices and 0 holes, not listed, extent 20.125,-13.721 21.613,-12.204
  region net NetQ9_3: 11.7,-18.8 22.1,-18.8 22.1,-11.2 11.7,-11.2

## Silkscreen, mask and mechanical layers (free items; w line width, h text height)
Top Overlay:
  lines w0.2: -41,10.6 -39,10.6 ; -41,12.6 -39,12.6 ; -41,14.6 -38.95,14.6 ; -40,8.6 -40,16.625 ; -39,8.6 -41,8.6 -41,16.625 -39,16.625 ; -38.95,8.6 -38.95,16.625 ; 33.3,12.2 29.7,12.2 27.7,12.2 27.7,7.7 29.7,7.7 ; 29.7,7.7 29.7,16.7 33.3,16.7 33.3,7.7 29.7,7.7
  text "C3" at -40.8,16.112 h0.6 r270
  text "C7" at -39.8,16.112 h0.6 r270
  text "C2" at -40.8,14.087 h0.6 r270
  text "C6" at -39.8,14.087 h0.6 r270
  text "DSG" at 31.946,13.154 h1 r90
  text "C5" at -39.8,12.112 h0.6 r270
  text "C1" at -40.8,12.012 h0.6 r270
  text "GND" at -40.8,10.387 h0.6 r270
  text "C4" at -39.8,10.087 h0.6 r270
  text "CHG" at 31.946,8.654 h1 r90
  text "MODE" at 29.146,8.154 h1 r90
  text "Battery Management / Designed By Alperen FENERCİ" at -32.7,-29.686 h0.8
Bottom Overlay:
  drawing of 13 lines, arcs and shapes, not listed
  text "CONNECT FROM THE LOWEST CELL AND SET THE MODE" at -42.141,-12.983 h1 r270